# EAGLE board usbtiny (EAGLE 6.4)
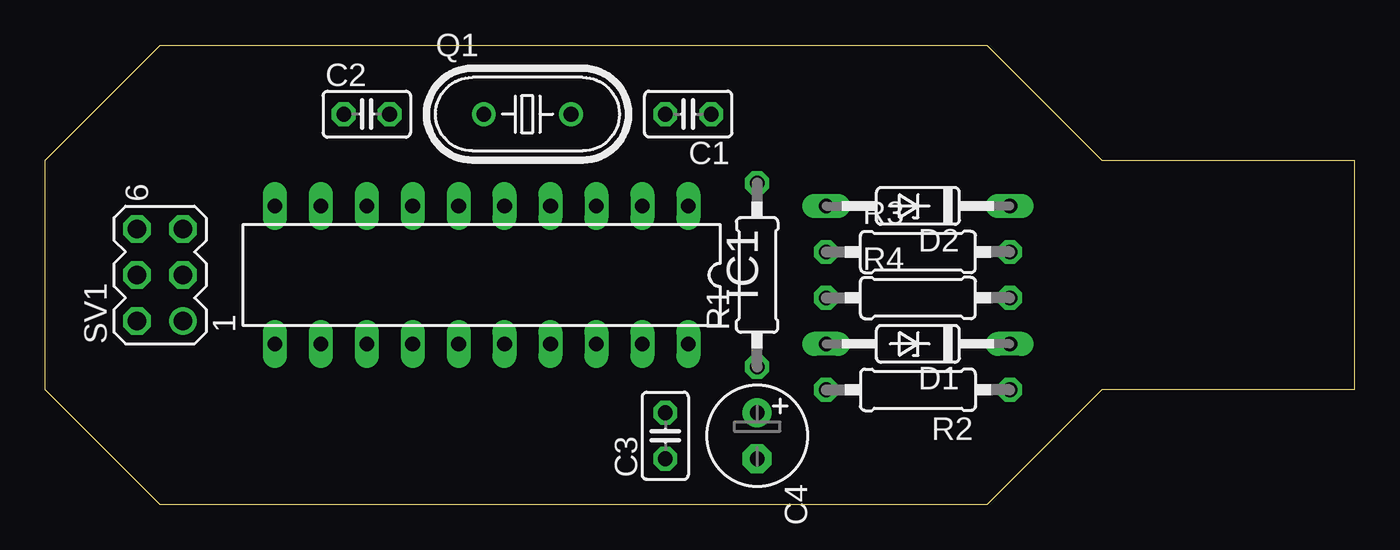
[diagram p0: board, top side]
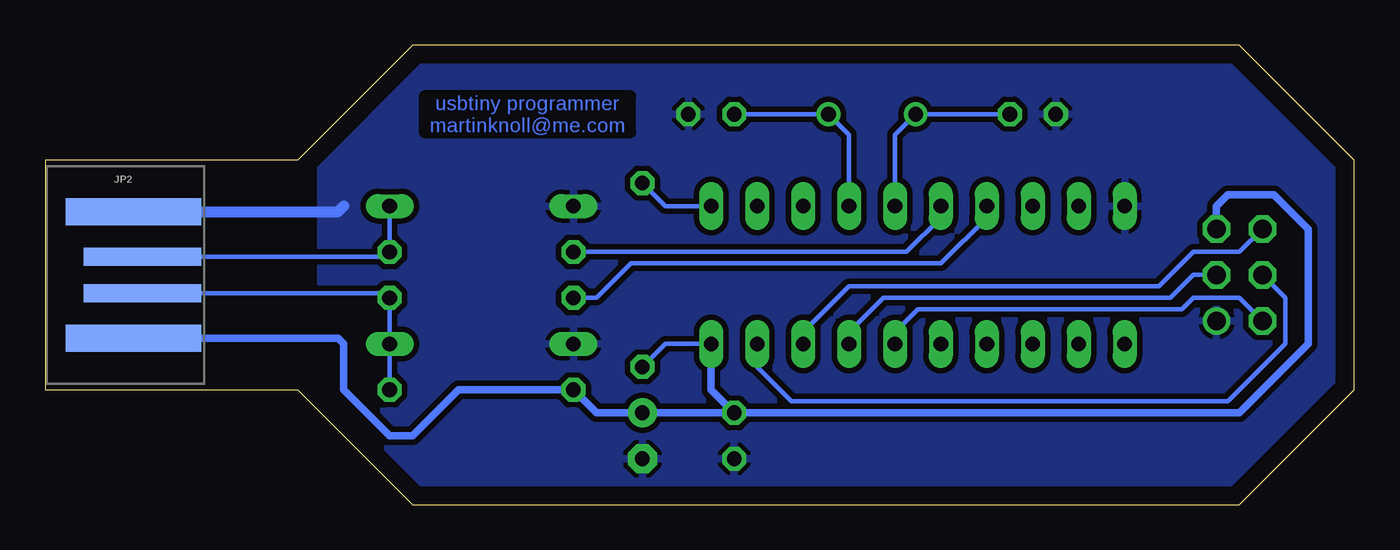
[diagram p1: board, bottom side, seen from below]

Size 72.39 x 25.4 mm. Coordinates in mm from the lower left corner, seen from the top.
Outline: 6.35,25.4 52.07,25.4 58.42,19.05 72.39,19.05 72.39,6.35 58.42,6.35 52.07,0 6.35,0 0,6.35 0,19.05 6.35,25.4
Copper layers (1*16): Top 0.035mm / dielectric 1.5mm / Bottom 0.035mm
Design rules "default *": minimum track width 1.6mm, minimum drill 0.6mm, track to track 8mil, track to pad 8mil, pad to pad 8mil, via to via 8mil, smd to smd 8mil, copper to edge 40mil, drill to drill 8mil, minimum pad ring 10mil, minimum via ring 8mil, stop-mask expansion 4mil, vias tented up to drill 0mil, thermal gap 10mil

## Footprints (pad centres in the part's own frame; a part is rotated, then mirrored left to right if it is on the bottom)
C025-025X050 = drill 0.813 octagon: 1 -1.27,0; 2 1.27,0
E2,5-6 = drill 0.813 pad 1.6: + -1.27,0 | drill 0.813 pad 1.6 octagon: - 1.27,0
DO35Z10 = drill 0.813 long: A 5.08,0; C -5.08,0
DIL20 = drill 0.813 long: 1 -11.43,-3.81; 2 -8.89,-3.81; 3 -6.35,-3.81; 4 -3.81,-3.81; 5 -1.27,-3.81; 6 1.27,-3.81; 7 3.81,-3.81; 8 6.35,-3.81; 9 8.89,-3.81; 10 11.43,-3.81; 11 11.43,3.81; 12 8.89,3.81; 13 6.35,3.81; 14 3.81,3.81; 15 1.27,3.81; 16 -1.27,3.81; 17 -3.81,3.81; 18 -6.35,3.81; 19 -8.89,3.81; 20 -11.43,3.81
USB-A-PCB = smd 7.5 x 1.5: 5V -0.2,-3.5; GND -0.2,3.5 | smd 6.5 x 1: USB_M 0.3,-1; USB_P 0.3,1
HC49U70 = drill 0.813: 1 -2.413,0; 2 2.413,0
0207/10 = drill 0.813 octagon: 1 -5.08,0; 2 5.08,0
MA03-2 = drill 1.016: 1 -2.54,-1.27 | drill 1.016 octagon: 2 -2.54,1.27; 3 0,-1.27; 4 0,1.27; 5 2.54,-1.27; 6 2.54,1.27

## Placement (x,y rotation side)
C1  [C025-025X050]  35.56,21.59 180 top
C2  [C025-025X050]  17.78,21.59 0 top
C3  [C025-025X050]  34.29,3.81 90 top
C4  [E2,5-6]  39.37,3.81 270 top
D1  [DO35Z10]  48.26,8.89 180 top
D2  [DO35Z10]  48.26,16.51 180 top
IC1  AT90S2313P  [DIL20]  24.13,12.7 180 top
JP2  USBPCB  [USB-A-PCB]  67.31,12.7 0 bottom
Q1  [HC49U70]  26.67,21.59 0 top
R1  [0207/10]  39.37,12.7 90 top
R2  [0207/10]  48.26,6.35 180 top
R3  [0207/10]  48.26,13.97 0 top
R4  [0207/10]  48.26,11.43 0 top
SV1  [MA03-2]  6.35,12.7 90 top

## Library data of the parts
C1-C4 = rcl
D1 D2 = diode
IC1 = atmel; OC_FARNELL: unknown; OC_NEWARK: unknown
JP2 = SparkFun-Connectors
Q1 = crystal; OC_FARNELL: unknown; OC_NEWARK: unknown
R1-R4 = resistor
SV1 = con-lstb; OC_FARNELL: unknown; OC_NEWARK: unknown

## Nets
GND: C1.1 C2.1 C3.1 C4.- D1.A D2.A IC1.10 JP2.GND SV1.1
N$1: C1.2 IC1.4 Q1.2
N$2: C2.2 IC1.5 Q1.1
N$3: IC1.1 R1.2
N$4: IC1.7 R4.1
N$5: IC1.6 R3.1
N$6: IC1.18 SV1.6
N$7: D2.C JP2.USB_P R3.2
N$8: IC1.19 SV1.4
N$10: IC1.17 SV1.3
N$11: IC1.16 SV1.2
N$12: D1.C JP2.USB_M R2.1 R4.2
VCC: C3.2 C4.+ IC1.20 JP2.5V R1.1 R2.2 SV1.5

## Tracks (layer width: path | path; a pad name or v marks a point on that pad's centre or on a via)
GND
  Bottom 0.61: JP2.GND 56.19,16.2 55.88,16.51
  pour Bottom (isolate 0.305): 0,25.4 57.15,25.4 57.15,0 0,0
N$1
  Bottom 0.254: C1.2 Q1.2 27.94,20.45 IC1.4
N$2
  Bottom 0.254: IC1.5 25.4,20.45 Q1.1 C2.2
N$3
  Bottom 0.254: R1.2 38.1,16.51 IC1.1
N$4
  Bottom 0.254: R4.1 41.91,11.43 40.01,13.34 22.86,13.34 20.32,15.88 IC1.7
N$5
  Bottom 0.254: R3.1 24.77,13.97 22.86,15.88 IC1.6
N$6
  Bottom 0.254: SV1.6 6.35,13.97 8.89,13.97 10.79,12.06 27.94,12.06 30.48,9.52 IC1.18
N$7
  Bottom 0.254: JP2.USB_P 53.61,13.7 R3.2 D2.C
N$8
  Bottom 0.254: SV1.4 3.81,11.43 3.81,8.89 6.98,5.72 31.12,5.72 33.02,7.62 IC1.19
N$10
  Bottom 0.254: SV1.3 8.89,12.7 10.16,11.43 26.04,11.43 27.94,9.52 IC1.17
N$11
  Bottom 0.254: SV1.2 6.35,11.43 8.89,11.43 9.53,10.8 24.13,10.8 25.4,9.52 IC1.16
N$12
  Bottom 0.254: JP2.USB_M 53.61,11.7 R4.2 D1.C R2.1
VCC
  Bottom 0.254: R1.1 38.1,8.89 IC1.20
  Bottom 0.406: C3.2 C4.+ 41.91,5.08 R2.2 49.53,6.35 52.07,3.81 53.34,3.81 55.88,6.35 55.88,8.89 56.19,9.2 JP2.5V | SV1.5 7.62,16.51 6.98,17.15 4.44,17.15 2.54,15.24 2.54,8.89 6.35,5.08 C3.2 | IC1.20 35.56,6.35 C3.2

## Text on the board
Bottom: usbtiny programmer / martinknoll@me.com